# Altium PCB Ttem_Lumineux.PcbDoc
Units mil, origin at the board's own origin, x right, y up, seen from the top; angles counter-clockwise.
Board outline 4310 x 3435 mil, 2 copper layers (Top Layer, Bottom Layer); 60 components, 47 nets, 231 pads, 671 vias.
Unrouted connection lines stored in the file: 53.
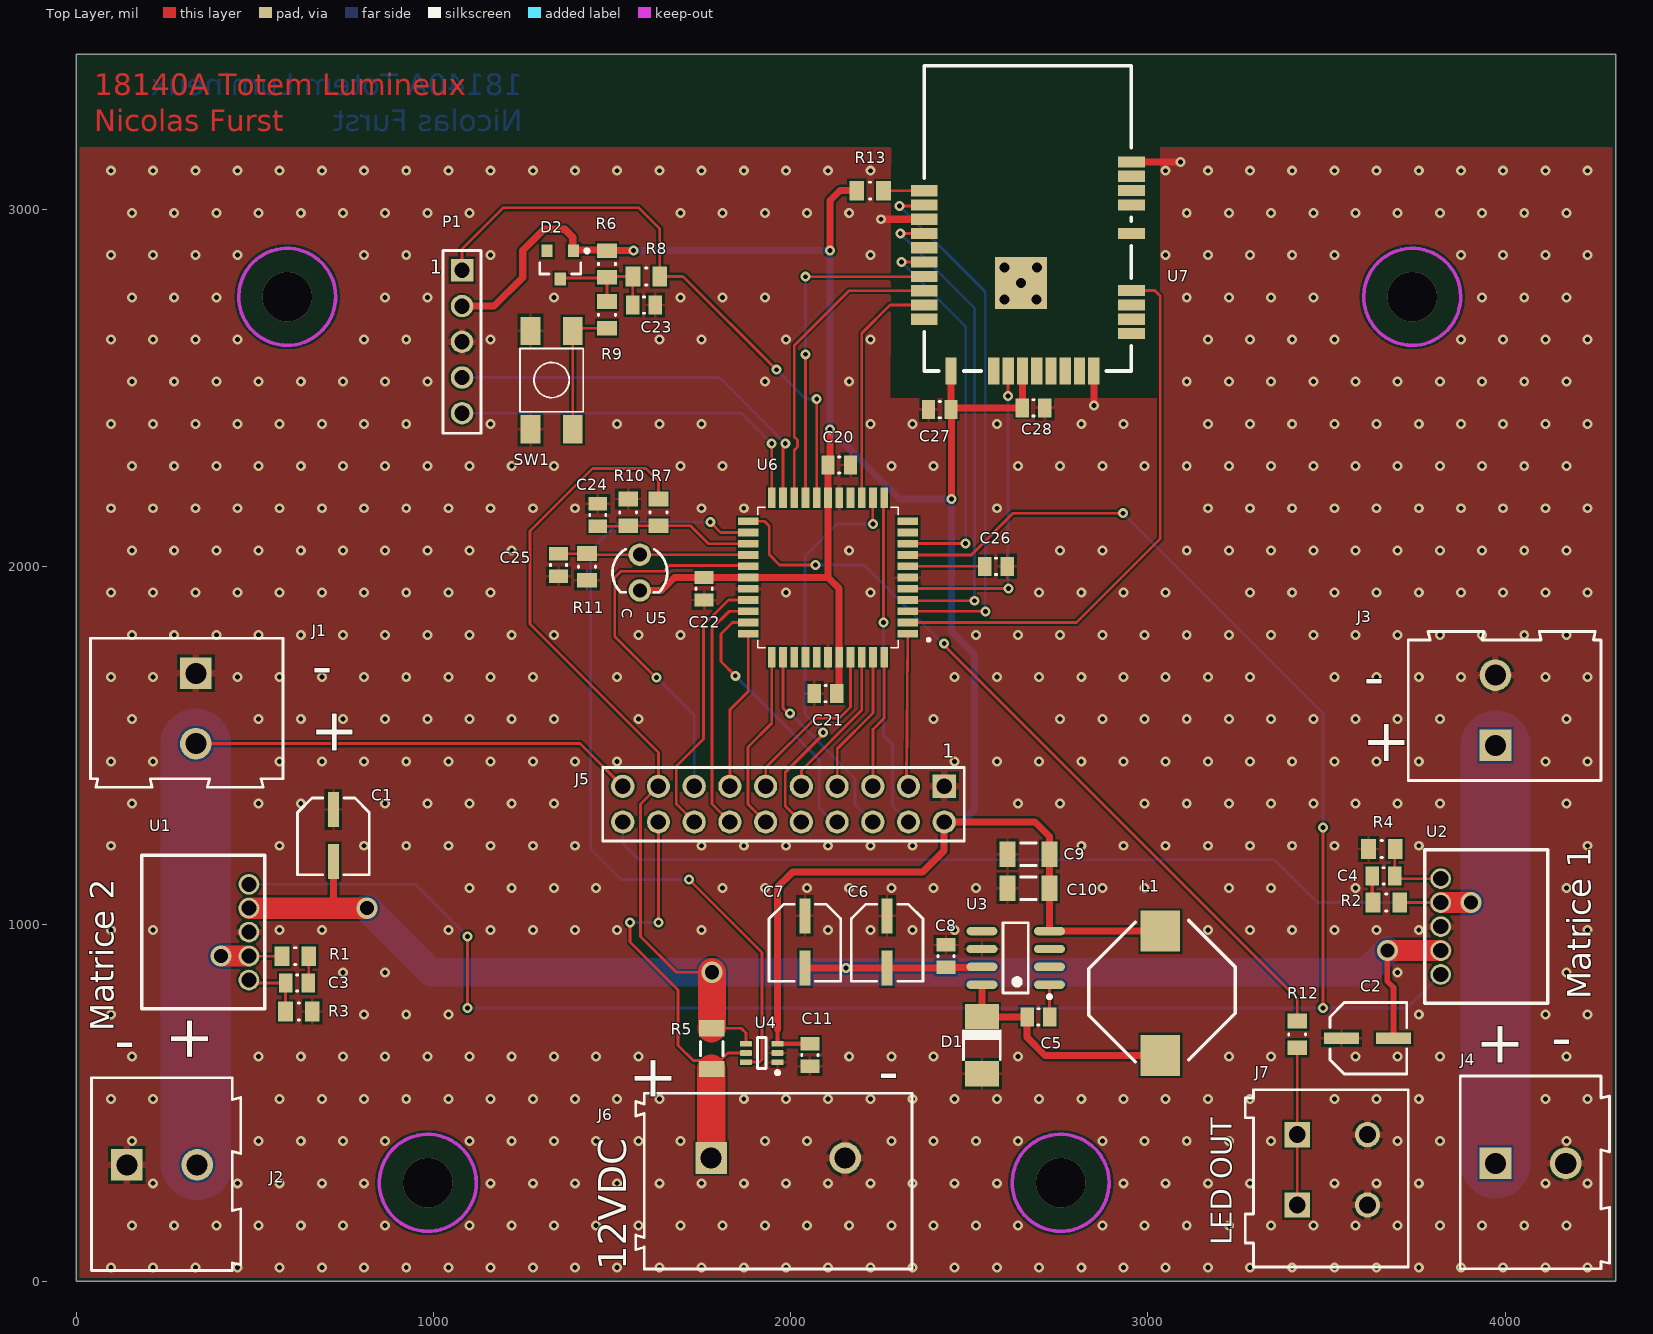
[diagram p0: Top Layer view]
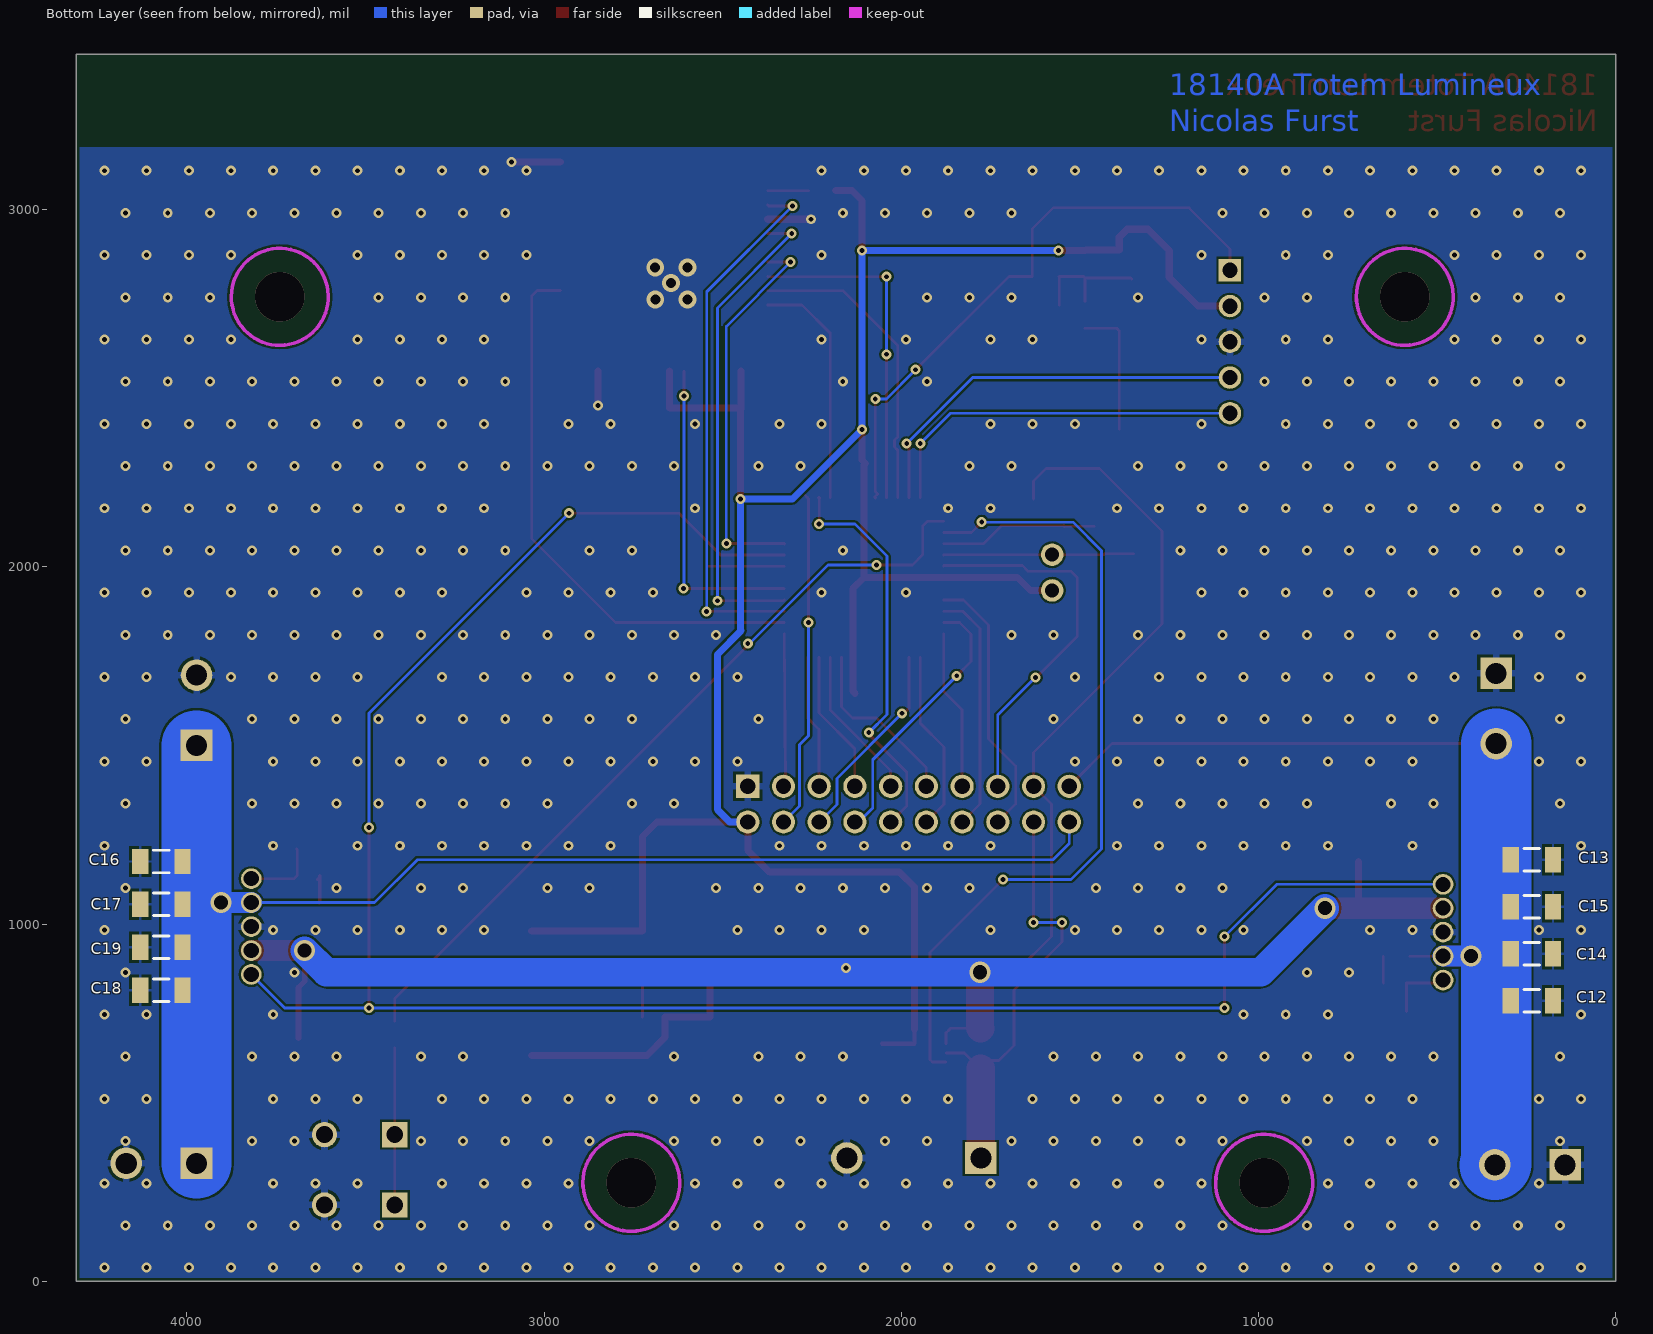
[diagram p1: Bottom Layer view, seen from below]

## Layer stack, top to bottom
Top Solder: solder mask 0.4, Solder Resist, Dk 3.5
Top Layer: signal copper 1.4
Dielectric 1: dielectric 12.6, FR-4, Dk 4.8
Bottom Layer: signal copper 1.4
Bottom Solder: solder mask 0.4, Solder Resist, Dk 3.5

## Board outline
0,0 0,3435 4310,3435 4310,0

## Design rules (kind name [scope] priority, off if disabled: settings)
BoardOutlineClearance [All] p1: gap=9.84 ignorepadtopadclearanceinfootprint=FALSE except(0: Arc-SplitContinuation Track-SplitContinuation SMDPad-SplitContinuation THPad-SplitContinuation Via-SplitContinuation Fill-SplitContinuation Poly-SplitContinuation Region-SplitContinuation Text-SplitContinuation)
Clearance Clearance-xPP-xTP-xTT [All] p1: gap=5.91 ignorepadtopadclearanceinfootprint=FALSE except(0: Arc-Hole Track-Hole SMDPad-Hole THPad-Hole Via-Hole Fill-Hole Poly-Hole Region-Hole Text-Hole)
ComponentClearance [All] p1: gap=9.84 collisioncheckmode=3 verticalgap=9.84 showdistances=FALSE
DiffPairsRouting [All] p1: maxlimit=9.84 minlimit=9.84 mostfreqgap=9.84 toplayer_minwidth=15 toplayer_maxwidth=15 toplayer_prefwidth=15 bottomlayer_minwidth=15 bottomlayer_maxwidth=15 bottomlayer_prefwidth=15 maxuncoupledlength=492.13
Height [All] p1: minheight=0 maxheight=984.25 prefheight=492.13
HoleSize HoleSize-PTH [All] p1: absolutevalues=TRUE maxlimit=393.7 minlimit=9.84 maxpercent=80.000 minpercent=20.000
HoleToHoleClearance [All] p1: gap=13.78 allowstackedmicrovias=TRUE
MinimumAnnularRing "Minimum IAR  >0.45mm" [((ObjectKind = 'Pad') OR (ObjectKind = 'Via')) And (Layer = 'MultiLayer') And (HoleDiameter > AsMM(0.45))] p1: minimumring=6.89 // minimum inner annular ring for pads > 0.45mm finished hole size
MinimumAnnularRing "Minimum IAR <=0.45mm" [((ObjectKind = 'Pad') OR (ObjectKind = 'Via')) And (Layer = 'MultiLayer') And (HoleDiameter <= AsMM(0.45))] p2: minimumring=6.89 // minimum inner annular ring for pads <= 0.45mm finished hole size
MinimumSolderMaskSliver [All] p1: minsoldermaskwidth=3.15
PlaneClearance PlaneClearance-IPI [All] p1: clearance=9.84
PlaneConnect [All] p1: planeconnectstyle=Relief reliefexpansion=6.89 reliefentries=4 reliefconductorwidth=7.87 reliefairgap=7.87
PolygonConnect PolygonConnect-xTW [All] p1: thpad.connectstyle=Relief thpad.reliefconductorwidth=19.68 thpad.reliefentries=4 thpad.polygonreliefangle="90 Angle" thpad.airgapwidth=7.87 smdpad.connectstyle=Relief smdpad.reliefconductorwidth=7.87 smdpad.reliefentries=4 smdpad.polygonreliefangle="90 Angle" smdpad.airgapwidth=7.87 via.connectstyle=Direct via.reliefconductorwidth=7.87 via.reliefentries=4 via.polygonreliefangle="90 Angle" via.airgapwidth=7.87
RoutingCorners [All] p1: cornerstyle=45-Degree minsetback=98.43 maxsetback=98.43
RoutingVias RoutingViasES [(ObjectKind = 'Via')] p1: holewidth=11.81 width=25.59 viastyle="Through Hole" minholewidth=9.84 minwidth=24.02 maxholewidth=17.72 maxwidth=31.5 // finishet hole size <= 0.45mm
SilkToSilkClearance [All] p1: silktosilkclearance=7.87
SilkToSolderMaskClearance SilkscreenOverComponentPads [IsPad] p1: minsilkscreentomaskgap=7.87 clearancetoexposedcopper=TRUE
SolderMaskExpansion [All] p1: expansion=0 istentingtop=FALSE
UnRoutedNet [All] p1: checkbadconnections=TRUE
Width Width-xTW [All] p1: maxlimit=393.7 minlimit=5.91 preferedwidth=7.87
18 further rules are at their usual default settings.

## Classes and differential pairs
net class Power: 5V_1 5V_2 12Vbatt Vbatt
component class Pic: C20 C21 C22 C23 C24 C25 C26 C27 C28 D2 J7 P1 R6 R7 R8 R9 R10 R11 R12 R13 SW1 U5 U6 U7
component class Alim: C1 C2 C3 C4 C5 C6 C7 C8 C9 C10 C11 C12 C13 C14 C15 C16 C17 C18 C19 D1 J1 J2 J3 J4 J5 J6 L1 R1 R2 R3 R4 R5 U1 U2 U3 U4

## Components (designator, comment, footprint, x,y, rotation, side; value= is the part's Value field where it differs from the comment)
C1 "47uF" Capacitor 720,1247.83 r90 top
C2 "47uF" Capacitor 3615,680 r180 top
C3 "39nF" CAPC0805(2012)155_L 618.42,835 r0 top value=4.7uF
C4 "39nF" CAPC0805(2012)155_L 3660,1135 r0 top value=4.7uF
C5 "10nF" CAPC0805(2012)155_L 2693.66,740 r180 top value=4.7uF
C6 "47uF" Capacitor 2270,950 r90 top
C7 "47uF" Capacitor 2040,950 r90 top
C8 "100n" CAPC0805(2012)155_L 2435,910 r90 top value=4.7uF
C9 "47uF" CAPC1206(3216)190_N 2665.94,1195 r0 top
C10 "47uF" CAPC1206(3216)190_N 2665.94,1100 r0 top
C11 "100n" CAPC0805(2012)155_L 2053.94,633.03 r270 top value=4.7uF
C12 "47uF" CAPC1206(3216)190_N 235,785 r0 bottom
C13 "47uF" CAPC1206(3216)190_N 235,1180 r0 bottom
C14 "47uF" CAPC1206(3216)190_N 235,916.67 r0 bottom
C15 "47uF" CAPC1206(3216)190_N 235,1048.33 r0 bottom
C16 "47uF" CAPC1206(3216)190_N 4071.89,1175 r180 bottom
C17 "47uF" CAPC1206(3216)190_N 4071.89,1055 r180 bottom
C18 "47uF" CAPC1206(3216)190_N 4071.89,815 r180 bottom
C19 "47uF" CAPC1206(3216)190_N 4071.89,935 r180 bottom
C20 "100n" CAPC0805(2012)155_L 2136.02,2285 r180 top value=4.7uF
C21 "100n" CAPC0805(2012)155_L 2097.76,1645 r0 top value=4.7uF
C22 "100n" CAPC0805(2012)155_L 1757.76,1938.5 r90 top value=4.7uF
C23 "" CAPC0805(2012)155_L 1589.45,2732.76 r180 top value=4.7uF
C24 "100n" CAPC0805(2012)155_L 1460,2145 r270 top value=4.7uF
C25 "100n" CAPC0805(2012)155_L 1350,2005 r90 top value=4.7uF
C26 "10uF" CAPC0805(2012)155_L 2575,2001.5 r180 top value=4.7uF
C27 "100n" CAPC0805(2012)155_L 2417.44,2440 r0 top value=4.7uF
C28 "100n" CAPC0805(2012)155_L 2680,2445 r180 top value=4.7uF
D1 "SK32" DO-214AC 2535.51,660.28 r270 top
D2 "BAS40-06LT1G" ONSC-SOT-23-3-318-08_V 1355,2845 r270 top
J1 "691211720002" 691211720002 309.41,1603.43 r270 top
J2 "691211720002" 691211720002 240,300 r0 top locked
J3 "691211720002" 691211720002 3998.74,1598.43 r90 top locked
J4 "691211720002" 691211720002 4071.57,304.41 r0 top locked
J5 "61302021121" 61302021121 1980,1335.59 r180 top
J6 "691250910002" 691250910002 1965,280 r0 top locked
J7 "691411710002B" 691411710002B 3500.83,288.23 r0 top locked
L1 "DO3308P-684" DO3308P 3035,689.84 r90 top
P1 "61300511121" 61300511121 1080,2630 r270 top
R1 "47R" RESC0805(2012)_N 613.42,910 r180 top value="1000000.00 Ohm"
R2 "47R" RESC0805(2012)_N 3667.6,1060 r0 top value="1000000.00 Ohm"
R3 "270R" RESC0805(2012)_N 623.42,755 r180 top value="1000000.00 Ohm"
R4 "270R" RESC0805(2012)_N 3655,1210 r0 top value="1000000.00 Ohm"
R5 "3mOhm" RESC1206(3216)_N 1778.94,651.02 r270 top value="1000000.00 Ohm"
R6 "" RESC0805(2012)_N 1485.94,2847.76 r90 top value="1000000.00 Ohm"
R7 "82k" RESC0805(2012)_N 1630,2152.4 r90 top value="1000000.00 Ohm"
R8 "" RESC0805(2012)_N 1595.94,2812.76 r180 top value="1000000.00 Ohm"
R9 "" RESC0805(2012)_N 1485.95,2705.16 r90 top value="1000000.00 Ohm"
R10 "18k" RESC0805(2012)_N 1545,2152.4 r270 top value="1000000.00 Ohm"
R11 "300R" RESC0805(2012)_N 1430,2000 r90 top value="1000000.00 Ohm"
R12 "0R" RESC0805(2012)_N 3418.15,690.83 r270 top value="1000000.00 Ohm"
R13 "1M" RESC0805(2012)_N 2222.4,3053.03 r180 top value="1000000.00 Ohm"
SW1 "430181038816" 430181038816 1330.94,2522.76 r90 top
U1 "DC-DC _12to5V" DC-DC 483.42,1111.18 r270 top
U2 "DC-DC _12to5V" DC-DC 3820,858.82 r90 top
U3 "LM2674M-3.3" M08A_N 2630,905 r180 top
U4 "INA214AIDCKT" DCK0006A_N 1918.94,638.94 r180 top
U5 "TEPT4400" "Type 3mm" 1577.76,1983.94 r270 top
U6 "PIC32MX130F256D" QFP80P1200X1200X120-44N 2104.53,1970 r180 top
U7 "ATWILC1000" ATWILC1000 2374.13,2548.15 r0 top locked

## Footprints (in the part's own frame and the unit in brackets; to place one, negate y for a bottom-side part, rotate by r counter-clockwise, add the part's x,y. Pads: shape width x height; smd on the part's side, far side on the other; paste and mask are expansions set on the pad)
61300511121 [mm] "Pin Header, pitch 2.54 mm, THT, Vertical, single row, 5p"
  rect 1.6x1.6 hole 1.1: 1(-5.08,0)
  round 1.6 hole 1.1: 2(-2.54,0) 3(0,0) 4(2.54,0) 5(5.08,0)
  silkscreen extent -6.5,-1.35 6.5,1.35, body extent -6.35,-1.27 6.35,1.27, height 8.57
61302021121 [mm] "Pin Header, pitch 2.54 mm, THT, Vertical, dual row, 20p"
  rect 1.65x1.65 hole 1.1: 1(-11.43,-1.27)
  round 1.65 hole 1.1: 2(-11.43,1.27) 3(-8.89,-1.27) 4(-8.89,1.27) 5(-6.35,-1.27) 6(-6.35,1.27) 7(-3.81,-1.27) 8(-3.81,1.27) 9(-1.27,-1.27) 10(-1.27,1.27) 11(1.27,-1.27) 12(1.27,1.27) 13(3.81,-1.27) 14(3.81,1.27) 15(6.35,-1.27) 16(6.35,1.27) 17(8.89,-1.27) 18(8.89,1.27) 19(11.43,-1.27) 20(11.43,1.27)
  silkscreen extent -12.85,-2.62 12.85,2.62, body extent -12.7,-2.54 12.7,2.54, height 8.59
430181038816 [mm] "4.5*4.5mm vertical type, SMD, height 3.8mm, black actuator, 160gf, T&R"
  rect 2x1.4 smd: 1(-3.5,1.5) 2(3.5,1.5) 3(-3.5,-1.5) 4(3.5,-1.5)
  silkscreen extent -2.25,-2.25 2.25,2.25, body extent -3.75,-2.25 3.75,2.25, height 3.78
691211720002 [mm] "5,00mm - modular - green -45¡ã entry with rising cage clamp - 02p"
  rect 2.25x2.25 hole 1.5: 1(-2.5,0.65)
  round 2.25 hole 1.5: 2(2.5,0.65)
  silkscreen extent -5,-6.85 5.6,6.85, body extent -5,-6.85 5.6,6.85, height 15.72
691250910002 [mm] "Serie 2509 - 9.52 mm _ 2 pins"
  rect 2.25x2.25 hole 1.5: 1(-4.76,1.65)
  round 2.25 hole 1.5: 2(4.76,1.65)
  silkscreen extent -10.12,-6.25 9.52,6.25, body extent -10.12,-6.25 9.52,6.25, height 21.6
691411710002B [mm] "5.00 mm Screwless Horizontal Entry - 2.0 mm2 Wires, 2p"
  rect 1.8x1.8 hole 1.2: 1(-2.1,-1.9) 1(-2.1,3.1)
  round 1.8 hole 1.2: 2(2.9,-1.9) 2(2.9,3.1)
  silkscreen extent -5.8,-6.3 5.8,6.3, body extent -5.8,-6.3 5.8,6.3, height 15.65
ATWILC1000 [mm]
  rect 1.9x0.8 smd: 1(14.73,2.67) 2(14.73,3.686) 3(14.73,4.702) 4(14.73,5.718) 5(14.73,9.782) 6(14.73,11.814) 7(14.73,12.83) 8(14.73,13.846) 9(14.73,14.862) 10(0,12.824) 11(0,11.808) 12(0,10.792) 13(0,9.776) 14(0,8.76) 15(0,7.744) 16(0,6.728) 17(0,5.712) 18(0,4.696) 19(0,3.68)
  rect 0.8x1.9 smd: 20(1.9,0) 21(4.948,0) 22(5.964,0) 23(6.98,0) 24(7.996,0) 25(9.012,0) 26(10.028,0) 27(11.044,0) 28(12.06,0)
  rect 3.7x3.7 smd: 29(6.88,6.27)
  silkscreen extent 0,0 14.73,21.72
Capacitor [mm]
  rect 2.5x0.8 smd: 1(-1.85,0) 2(1.85,0)
  silkscreen extent -2.79,-2.55 2.67,2.55
CAPC0805(2012)155_L [mm] "Chip Capacitor, Body 2.0x1.2mm, Height 1.55mm, IPC High Density"
  rect 0.95x1.35 smd: 1(-0.8,0) 2(0.8,0)
  silkscreen extent -0.05,-0.58 0.05,0.58, body extent -1.1,-0.72 1.1,0.72, height 1.55
CAPC1206(3216)190_N [mm] "Chip Capacitor, Body 3.2x1.6mm, Height 1.9mm, IPC Medium Density"
  rect 1.15x1.8 smd: 1(-1.5,0) 2(1.5,0)
  silkscreen extent -0.55,-0.8 0.55,0.8, body extent -1.7,-0.9 1.7,0.9, height 1.9
DC-DC [mm]
  round 1.47 hole 1.07: 1(0,0) 2(1.7,0) 3(3.4,0) 4(5.11,0) 5(6.81,0)
  silkscreen extent -2.06,-7.62 8.86,1.14
DCK0006A_N [mm] "SOT23, 6-Leads, Body 2.15x1.4mm, Pitch 0.65mm, IPC Medium Density"
  rrect25% 0.85x0.4 smd: 1(-1.125,0.65) 2(-1.125,0) 3(-1.125,-0.65) 4(1.125,-0.65) 5(1.125,0) 6(1.125,0.65)
  silkscreen extent -1.25,-1.1 0.3,1.52, body extent -1.14,-1 1.14,1, height 0.94
DO3308P [mm]
  rect 2.92x2.79 smd: 1(-1.46,0) 2(7.37,0)
  silkscreen extent -1.91,-5.33 8.13,5.08
DO-214AC [mm]
  rect 1.8x2.4 smd: 1(-2.025,0) 2(2.025,0)
  silkscreen extent -1.06,-1.3 1.02,1.3
M08A_N [mm] "SOIC, 8-Leads, Body 4.9x3.9mm, Pitch 1.27mm, IPC Medium Density"
  oval 2.2x0.6 smd: 1(-2.4,1.905) 2(-2.4,0.635) 3(-2.4,-0.635) 4(-2.4,-1.905) 5(2.4,-1.905) 6(2.4,-0.635) 7(2.4,0.635) 8(2.4,1.905)
  silkscreen extent -2.53,-2.5 0.9,2.88, body extent -2,-2.5 2,2.5, height 1.75
ONSC-SOT-23-3-318-08_V [mm] "SOT23, 3-Leads, Body 2.92x1.3mm, Pitch 0.95mm"
  rect 0.9x0.8 smd: 1(-1,0.95) 2(-1,-0.95) 3(1,0)
  silkscreen extent -1.12,-1.46 0.65,2.03, body extent -0.65,-1.46 0.65,1.46, height 1.11
QFP80P1200X1200X120-44N [mm]
  rect 1.47x0.55 smd: 1(-5.67,4) 2(-5.67,3.2) 3(-5.67,2.4) 4(-5.67,1.6) 5(-5.67,0.8) 6(-5.67,0) 7(-5.67,-0.8) 8(-5.67,-1.6) 9(-5.67,-2.4) 10(-5.67,-3.2) 11(-5.67,-4) 23(5.67,-4) 24(5.67,-3.2) 25(5.67,-2.4) 26(5.67,-1.6) 27(5.67,-0.8) 28(5.67,0) 29(5.67,0.8) 30(5.67,1.6) 31(5.67,2.4) 32(5.67,3.2) 33(5.67,4)
  rect 0.55x1.47 smd: 12(-4,-5.67) 13(-3.2,-5.67) 14(-2.4,-5.67) 15(-1.6,-5.67) 16(-0.8,-5.67) 17(0,-5.67) 18(0.8,-5.67) 19(1.6,-5.67) 20(2.4,-5.67) 21(3.2,-5.67) 22(4,-5.67) 34(4,5.67) 35(3.2,5.67) 36(2.4,5.67) 37(1.6,5.67) 38(0.8,5.67) 39(0,5.67) 40(-0.8,5.67) 41(-1.6,5.67) 42(-2.4,5.67) 43(-3.2,5.67) 44(-4,5.67)
  silkscreen extent -7.26,-5 5,5
RESC0805(2012)_N [mm] "Chip Resistor, Body 2.0x1.3mm, IPC Medium Density"
  rect 1.05x1.4 smd: 1(-0.95,0) 2(0.95,0)
  silkscreen extent -0.05,-0.6 0.05,0.6, body extent -1.1,-0.67 1.1,0.68, height 0.7
RESC1206(3216)_N [mm] "Chip Resistor, Body 3.2x1.6mm, IPC Medium Density"
  rect 1.15x1.8 smd: 1(-1.45,0) 2(1.45,0)
  silkscreen extent -0.5,-0.8 0.5,0.8, body extent -1.67,-0.87 1.67,0.87, height 0.75
"Type 3mm" [mm] "THT, LED-3mm, 2pin- Body 4.15mm(max)"
  round 1.6 hole 1: 1(1.27,0) 2(-1.27,0)
  silkscreen extent -1.66,-1.95 1.4,1.95, body extent -1.93,-1.94 1.87,1.94, height 10.5

## Part data
C1 C2 C6 C7: library part CMP-2000-06221-1, "Conductive Polymer Hybrid Aluminum Electrolytic Capacitor, 100 uF, +/- 20%, 50 V, -55 to 105 degC, 2-Pin SMD (G), RoHS, Tape and Reel", Capacitance=100uF, Case Diameter=10mm, Case Height=10.5mm, Case Length=10.2mm, Manufacturer=Panasonic, Maximum Operating Temperature=+105C, Minimum Operating Temperature=-55C, Package Description="2-Pin Surface Mount Device, Body 10.3 x 10.3 mm", Package Reference=ZA-G, Ripple Current=2A, Tolerance=20%, Voltage Rating DC=50V, Brand=Panasonic, Datasheet URL=https://industrial.panasonic.com/cdbs/www-data/pdf/RDD0000/DMD0000COL56.pdf, Datasheet Version=06/2016, ESR=28mOhms, Factory Pack Quantity=500, Height=10.5mm, Load Life=10000Hour, Manufacturer URL=http://www.panasonic.com/, Mounting Technology=SurfaceMount, Packaging=Reel, Product=AluminumElectrolyticCapacitors, Product Category=AluminumOrganicPolymerCapacitors, RoHS=Details, Series=ZA, Termination Style=SMD/SMT
C3 C4 C5 C8 C11 C20 C21 C22 C23 C24 C25 C26 C27 C28: library part Capa, Case-EIA=0805, Case-Metric=2012, Rated Voltage="10 V", Tolerance=Â±10%, Max Thickness="1.55 mm", Technology=SMT
C9 C10 C12 C13 C14 C15 C16 C17 C18 C19: library part CMP-1037-05002-1, "CAP 47uF 10V ±20% 1206 (3216 Metric) Thickness 1.9mm SMD", Case-EIA=1206, Case-Metric=3216, Rated Voltage="10 V", Tolerance=Â±20%, Max Thickness="1.9 mm", Technology=SMT
D1: "Shotky diod", Emitting color="Super Red", Manufacturer="Wuerth Elektronik", PartNumber=151031SS04000, ComponentLink1Description="Manufacturer URL", ComponentLink1URL=http://www.we-online.com, ComponentLink2Description=Datasheet, ComponentLink2URL=http://katalog.we-online.de/pbs/datasheet/7448042001.pdfhttp://katalog.we-online.de/pbs/datasheet/7448042001.pdfhttp://katalog.we-online.de/pbs/datasheet/7448042001.pdfhttp://katalog.we-online.de/pbs/datasheet/151031SS04000.pdf, PackageReference="Type 3mm"
D2: library part CMP-1055-00547-1, "Common Anode Schottky Barrier Diodes, 3-Pin SOT-23, Pb-Free, Tape and Reel", Manufacturer="On Semiconductor", ComponentLink1Description="Manufacturer URL", ComponentLink1URL=http://www.onsemi.com/, ComponentLink2Description=Datasheet, ComponentLink2URL=http://www.onsemi.cn/pub_link/Collateral/BAS40-06LT1-D.PDF, ComponentLink3Description="Package Specification", ComponentLink3URL=http://www.onsemi.cn/pub_link/Collateral/318-08.PDF, Configuration="Common Anode", DatasheetVersion="Rev. 8", Mounting Technology="Surface Mount", PackageDescription="3-Pin Small Outline Transistor, Body 2.92 x 1.3 mm, Pitch 0.95 mm", PackageReference=SOT-23-3-318-08, PackageVersion="Rev. AP, 11/2009", Packing="Tape and Reel", PartNumber=BAS40-06LT1G, RoHS=TRUE
J1 J2 J3 J4: library part CMP-1502-02524-1, "Serie 211 - 5.00 mm 45deg Entry Modular with Rising Cage Clamp - 15.50 mm Height WR-TBL, 2 pin", Manufacturer="Wurth Elektronik", Operating Temperature=-40to105degC, Datasheet URL=http://katalog.we-online.de/em/datasheet/6912117200xx.pdf, Manufacturer URL=http://www.we-online.de, Mounting Technology=THT, Package Reference=691211720002, Packaging=Box, Part Number=691211720002, Pin Number=2, Pitch=5.00mm, Publisher=WurthElektronik
J5: library part CMP-1502-01104-1, "THT Vertical Pin Header WR-PHD, Pitch 2.54 mm, Dual Row, 20 pins", Contact Resistance=20mOhm, Manufacturer="Wurth Elektronik", Operating Temperature=-40to105degC, Rated Current=3A, Withstanding Voltage=500VAC, Working Voltage=250VAC, Datasheet URL=https://katalog.we-online.de/em/datasheet/6130xx21121.pdf, Gender=Male, Manufacturer URL=http://www.we-online.de, Mounting Technology=THT, Orientation=Vertical, Package Reference=61302021121, Packaging=Bag, Part Number=61302021121, Pin Number=20, Pitch=2.54mm, Publisher=WurthElektronik, Row Number=Dual
J6: library part CMP-1502-02750-1, "Serie 2509 - 9.52 mm Horizontal Entry Modular with Rising Cage Clamp WR-TBL, 2 pin", Manufacturer="Wurth Elektronik", Operating Temperature=-30to120degC, Datasheet URL=http://katalog.we-online.de/em/datasheet/6912509100XX.pdf, Manufacturer URL=http://www.we-online.de, Mounting Technology=THT, Package Reference=691250910002, Packaging=Box, Part Number=691250910002, Pin Number=2, Pitch=9.52mm, Publisher=WurthElektronik
J7: library part CMP-1502-03026-1, "Serie 411 B - 5.00mm Screwless Horizontal Entry-2.0mm2 Wires WR-TBL, 2 pin", Manufacturer="Wurth Elektronik", Operating Temperature=-40to105degC, Datasheet URL=http://katalog.we-online.de/em/datasheet/6914117100xxB.pdf, Manufacturer URL=http://www.we-online.de, Mounting Technology=THT, Package Reference=691411710002B, Packaging=Box, Part Number=691411710002B, Pin Number=2, Pitch=5.00mm, Publisher=WurthElektronik
P1: library part CMP-1502-01068-1, "THT Vertical Pin Header WR-PHD, Pitch 2.54 mm, Single Row, 5 pins", Contact Resistance=20mOhm, Manufacturer="Wurth Elektronik", Operating Temperature=-40to105degC, Rated Current=3A, Withstanding Voltage=500VAC, Working Voltage=250VAC, Datasheet URL=https://katalog.we-online.de/em/datasheet/6130xx11121.pdf, Gender=Male, Manufacturer URL=http://www.we-online.de, Mounting Technology=THT, Orientation=Vertical, Package Reference=61300511121, Packaging=Bag, Part Number=61300511121, Pin Number=5, Pitch=2.54mm, Publisher=WurthElektronik, Row Number=Single
R1 R2 R3 R4 R5 R6 R7 R8 R9 R10 R11 R12 R13: library part Resistor, Case-EIA=0805, Case-Metric=2012, Power="0.125 W", Tolerance="1 %", Technology=SMT
SW1: library part CMP-1454-00001-1, "WS-TASV SMD Tact Switch 4.5X4.5 mm", Manufacturer="Wuerth Elektronik", ComponentLink1Description="Manufacturer URL", ComponentLink1URL=http://www.we-online.com, ComponentLink2Description=Datasheet, ComponentLink2URL=http://katalog.we-online.de/em/datasheet/430181038816.pdf, NoPins=04, PackageReference=430181038816, PartNumber=430181038816
U3: library part CMP-0069-00679-2, "SIMPLE SWITCHER® Power Converter High Efficiency 500mA Step-Down Voltage Regulator, 8-pin Narrow SOIC", Manufacturer="National Semiconductor", PackageTopMarking=NSZXTT*2674*M3.3, PowerWise=N, Code_IPC=SOIC127P600-8, Code_JEDEC=MS-012-AA, ComponentLink1Description="LM2674 Datasheet", ComponentLink1URL=http://www.national.com/ds/LM/LM2674.pdf, ComponentLink2Description="LM2674 Web Page", ComponentLink2URL=http://www.national.com/pf/LM/LM2674.html, ComponentLink3Description="M08A Package Page", ComponentLink3URL=http://www.national.com/packaging/folders/m08a.html, CompType=Switcher, DatasheetVersion=Mar-2005, PackageDescription="SOIC Narrow, 4.9 x 3.9 x 1.45mm, 8 Lead, 1.27mm Pitch", PackageReference=M08A, PackageVersion="revM, May-2009", PinCount=8, RevisionNote="Component URLs added", RoHS=N
U4: library part CMP-2000-06456-1, "Voltage Output, High / Low-Side Measurement, Bi-Directional Zero-Drift Series, Current Shunt Monitor, 2.7 to 26 V, -40 to 125 degC, 6-Pin SOT-23 (DCK6), Green (RoHS & no Sb/Br), Tape and Reel", Manufacturer=TexasInstruments, Maximum Operating Temperature=+125C, Minimum Operating Temperature=-40C, Operating Supply Current=115uA, Package / Case=SOT-23-6, Package Description="6-Pin Plastic Small Outline, Body 2 x 1.25 mm, Pitch 0.65 mm", Package Reference=DCK6, Package Version="4093553-4/G, 01/2007", Supply Voltage - Max=26V, Supply Voltage - Min=2.7V, Vcm - Common Mode Voltage=-0.3Vto+26V, Vos - Input Offset Voltage=60uV, Accuracy=1%, Amplifier Type=CurrentSense, Brand=TexasInstruments, CMRR - Common Mode Rejection Ratio=105dB, Datasheet URL=http://www.ti.com/lit/gpn/INA214?keyMatch=INA214AIDCKT&tisearch=Search-EN-Everything, Datasheet Version="Rev. G, 07/2014", Development Kit=INA210-214EVM, Gain Error=0.02%, Gain V/V=100V/V, GBP - Gain Bandwidth Product=30kHz, Manufacturer URL=http://www.ti.com/, Mounting Style=SMD/SMT, Mounting Technology=SurfaceMount, Number of Channels=1Channel, Packaging=Reel, Product=CurrentSenseAmplifiers, Product Category=CurrentSenseAmplifiers, RoHS=True, Series=INA214, Topology=CurrentShuntFeedback, Unit Weight=0.000088oz
U6: Manufacturer=Microchip, PartNumber=PIC32MX130F064D-I/TL, ComponentLink1Description="Manufacturer URL", ComponentLink1URL=http://www.microchip.com, ComponentLink2Description=Datasheet, ComponentLink2URL=http://ww1.microchip.com/downloads/en/DeviceDoc/61168E.pdf, ComponentLink3Description="Package Specification", ComponentLink3URL=http://www.microchip.com/stellent/groups/techpub_sg/documents/packagingspec/en012702.pdf, ComponentLink4Description="Product URL", ComponentLink4URL=http://www.microchip.com/PIC32MX130F064D, DatasheetVersion="Rev. E", Mounting Technology="Surface Mount", PackageDescription="44-Lead Terminal Very Thin Leadless Array Package, 6 x 6 mm Body, 0.5 mm Pitch", PackageReference=VTLA-TL44, PackageVersion=C04-157C

## Via types
v1: diameter 27.95, hole 13.78, Top Layer to Bottom Layer, tented both sides, 657 vias
v2: diameter 59.06, hole 39.37, Top Layer to Bottom Layer, 5 vias
v3: diameter 50, hole 28, Top Layer to Bottom Layer, 5 vias
v4: diameter 137.8, hole 137.8, Top Layer to Bottom Layer, 4 vias

## Nets (pads, with @x,y where several pads share a name; then routed paths per layer and width w, separated by ;. In a path a pad name is that pad's centre, name@x,y a point inside that pad or via, vN(x,y) a via of type N, cw(c..) or ccw(c..) an arc to the next point about the centre after c; other vN are vias at no path point)
3V3: C9.2 C10.2 C11.1 C20.2 C21.2 C22.2 C27.2 C28.2 D2.1 J5.2 L1.2 P1.2 R6.2 R13.2 U3.4 U4.3 U5.1 U6.17 U6.28 U6.40 U7.20 U7.23 | length 7326.7
  Top Layer w11.81: 1963.23,705 U4.3 C11.1
  Top Layer w19.68: P1.2 1170,2730 1250,2810 1250,2885.63 1309.37,2945 1367.64,2945 1390,2922.64 1390,2887.13 1483.98,2887.13 R6.2 1486.1,2885 v1(1560,2885) ; U5.1 1638.46,1933.94 1674.53,1970 C22.2 U6.28 2105,1970 ; 1963.23,705 1963.23,1103.23 2005,1145 2368.66,1145 2430,1206.34 J5.2 2684.41,1285.59 2725,1245 C9.2 C10.2 2725,980.51 U3.4 L1.2 ; v1(2110,2384.96) 2110,2299.53 2100,2289.53 C20.2 U6.17 2104.53,1970.47 2105,1970 ; v1(2110,2885) 2110,3025 2138.03,3053.03 R13.2 ; C21.2 2136.02,1651.77 U6.40 2136.02,1938.98 2105,1970 ; U7.20 C27.2 ; v1(2450,2190) 2450,2438.94 C27.2 ; U7.23 2648.94,2445.43 C28.2 2453.94,2445 C27.2
  Bottom Layer w19.68: v1(1560,2885) v1(2110,2885) v1(2110,2384.96) 2304.96,2190 v1(2450,2190) 2450,1822.13 2448.94,1821.06 2515,1755 2515,1320 2480.59,1285.59 J5.2
5V_1: C12.2 C13.2 C14.2 C15.2 J1.2 J2.2 J5.19 R1.2 U1.4 | length 2674.7
  Top Layer w7.87: J1.2 1410.59,1505 J5.19 ; U1.4 R1.2
  Top Layer w59.06: v2(405,910) U1.4
  Bottom Layer w59.06: v2(405,910) U1.4
  Bottom Layer w196.85: J1.2 335,329.02 J2.2
5V_2: C16.2 C17.2 C18.2 C19.2 J3.1 J4.1 J5.20 R2.2 U2.4 | length 3942.1
  Top Layer w7.87: R2.2 U2.4
  Top Layer w59.06: U2.4 v2(3905,1060)
  Bottom Layer w7.87: J5.20 1530,1225 1575,1180 3355,1180 3475,1060 U2.4 ; v2(3905,1060) 3973.15,1060
  Bottom Layer w59.06: U2.4 v2(3905,1060)
  Bottom Layer w196.85: J4.1 3973.15,1060 J3.1
12Vbatt: C1.1 C2.1 C6.1 C7.1 C8.1 J5.17 R5.1 R7.2 U1.2 U2.2 U3.7 U4.4 | length 6648.8
  Top Layer w7.87: R7.2 1630,2240 1595,2275 1445,2275 1270,2100 1270,1840 1630,1480 J5.17 1580,1335.59 1580,965 1680,865 v2(1780,865) ; R5.1 1861.89,708.11 1874.65,695.35 U4.4
  Top Layer w15.75: v2(3670.75,925.75) 3670.75,839.25 3687.83,822.17 C2.1
  Top Layer w19.68: 720,1044.25 C1.1 ; C7.1 v1(2155,877.17) C6.1 2433.66,877.17 C8.1 2534.02,878.5 U3.7
  Top Layer w59.06: U1.2 720,1044.25 v2(814.25,1044.25) ; v2(3670.75,925.75) U2.2
  Top Layer w78.74: R5.1 1780,709.17 v2(1780,865)
  Bottom Layer w78.74: v2(814.25,1044.25) 993.5,865 v2(1780,865) 3610,865 v2(3670.75,925.75)
GND: C1.2 C2.2 C6.2 C7.2 C8.2 C9.1 C10.1 C11.2 C12.1 C13.1 C14.1 C15.1 C16.1 C17.1 C18.1 C19.1 C20.1 C21.1 C22.1 C23.1 C24.1 C25.1 C26.1 C27.1 C28.1 D1.2 J1.1 J2.1 J3.2 J4.2 J5.1 J6.2 J7.2 P1.3 R3.1 R4.1 R10.1 R11.1 SW1.1 SW1.2 U1.3 U2.3 U3.6 U4.1 U4.2 U6.6 U6.16 U6.29 U6.39 U7.9 U7.12 U7.28 U7.29 | length 355.9
  Top Layer w19.68: v1(2253.03,2973.03) U7.12 ; v1(2848.94,2451.06) U7.28 ; U7.9 v1(3091.73,3133.27)
  other v1: 97.13,37.99 215.24,37.99 333.35,37.99 451.46,37.99 569.57,37.99 687.68,37.99 805.79,37.99 923.9,37.99 1042.01,37.99 1160.12,37.99 1278.23,37.99 1396.34,37.99 1514.45,37.99 1632.56,37.99 1750.67,37.99 1868.78,37.99 1986.89,37.99 2105,37.99 2223.11,37.99 2341.22,37.99 2459.33,37.99 2577.44,37.99 2695.55,37.99 2813.66,37.99 2931.77,37.99 3049.88,37.99 3167.99,37.99 3286.1,37.99 3404.21,37.99 3522.32,37.99 3640.43,37.99 3758.54,37.99 3876.65,37.99 3994.76,37.99 4112.87,37.99 4230.98,37.99 156.18,156.1 274.29,156.1 392.4,156.1 510.51,156.1 628.62,156.1 746.73,156.1 864.84,156.1 1101.06,156.1 1219.17,156.1 1337.28,156.1 1455.39,156.1 1573.5,156.1 1691.61,156.1 1809.72,156.1 1927.83,156.1 2045.94,156.1 2164.06,156.1 2282.17,156.1 2400.28,156.1 2518.39,156.1 2636.5,156.1 2872.72,156.1 2990.83,156.1 3108.94,156.1 3227.05,156.1 3345.16,156.1 3463.27,156.1 3581.38,156.1 3699.49,156.1 3817.6,156.1 3935.71,156.1 4053.82,156.1 4171.93,156.1 215.24,274.21 451.46,274.21 569.57,274.21 687.68,274.21 805.79,274.21 1160.12,274.21 1278.23,274.21 1396.34,274.21 1514.45,274.21 1632.56,274.21 1750.67,274.21 1868.78,274.21 1986.89,274.21 2105,274.21 2223.11,274.21 2341.22,274.21 2459.33,274.21 2577.44,274.21 2931.77,274.21 3049.88,274.21 3167.99,274.21 3286.1,274.21 3522.32,274.21 3640.43,274.21 3758.54,274.21 4112.87,274.21 4230.98,274.21 156.18,392.32 510.51,392.32 628.62,392.32 746.73,392.32 864.84,392.32 1101.06,392.32 1219.17,392.32 1337.28,392.32 1455.39,392.32 1573.5,392.32 1691.61,392.32 1927.83,392.32 2045.94,392.32 2282.17,392.32 2400.28,392.32 2518.39,392.32 2636.5,392.32 2872.72,392.32 2990.83,392.32 3108.94,392.32 3227.05,392.32 3345.16,392.32 3699.49,392.32 3817.6,392.32 4171.93,392.32 97.13,510.43 215.24,510.43 569.57,510.43 687.68,510.43 805.79,510.43 923.9,510.43 1042.01,510.43 1160.12,510.43 1278.23,510.43 1396.34,510.43 1514.45,510.43 1632.56,510.43 1868.78,510.43 1986.89,510.43 2105,510.43 2223.11,510.43 2341.22,510.43 2459.33,510.43 2577.44,510.43 2695.55,510.43 2813.66,510.43 2931.77,510.43 3049.88,510.43 3167.99,510.43 3286.1,510.43 3522.32,510.43 3640.43,510.43 3758.54,510.43 4112.87,510.43 4230.98,510.43 156.18,628.54 510.51,628.54 628.62,628.54 746.73,628.54 864.84,628.54 982.95,628.54 1101.06,628.54 1219.17,628.54 1337.28,628.54 1455.39,628.54 1573.5,628.54 2164.06,628.54 2282.17,628.54 2400.28,628.54 2636.5,628.54 3227.05,628.54 3345.16,628.54 3581.38,628.54 3699.49,628.54 3817.6,628.54 4171.93,628.54 97.13,746.65 805.79,746.65 923.9,746.65 1042.01,746.65 3758.54,746.65 4112.87,746.65 4230.98,746.65 746.73,864.76 864.84,864.76 3699.49,864.76 4171.93,864.76 97.13,982.87 215.24,982.87 569.57,982.87 687.68,982.87 1042.01,982.87 1160.12,982.87 1278.23,982.87 1396.34,982.87 1514.45,982.87 1750.67,982.87 2105,982.87 2223.11,982.87 2341.22,982.87 2459.33,982.87 3167.99,982.87 3286.1,982.87 3404.21,982.87 3522.32,982.87 3640.43,982.87 3758.54,982.87 4230.98,982.87 1101.06,1100.98 1219.17,1100.98 1337.28,1100.98 1455.39,1100.98 1809.72,1100.98 1927.83,1100.98 2045.94,1100.98 2164.06,1100.98 2282.17,1100.98 2400.28,1100.98 2518.39,1100.98 2872.72,1100.98 2990.83,1100.98 3227.05,1100.98 3345.16,1100.98 3581.38,1100.98 4171.93,1100.98 97.13,1219.09 569.57,1219.09 805.79,1219.09 923.9,1219.09 1042.01,1219.09 1160.12,1219.09 1278.23,1219.09 1396.34,1219.09 1750.67,1219.09 1868.78,1219.09 1986.89,1219.09 2105,1219.09 2223.11,1219.09 2341.22,1219.09 2813.66,1219.09 2931.77,1219.09 3049.88,1219.09 3167.99,1219.09 3286.1,1219.09 3404.21,1219.09 3522.32,1219.09 3758.54,1219.09 4230.98,1219.09 156.18,1337.2 510.51,1337.2 628.62,1337.2 864.84,1337.2 982.95,1337.2 1101.06,1337.2 1219.17,1337.2 1337.28,1337.2 2636.5,1337.2 2754.61,1337.2 2990.83,1337.2 3108.94,1337.2 3227.05,1337.2 3345.16,1337.2 3463.27,1337.2 3581.38,1337.2 3699.49,1337.2 3817.6,1337.2 4171.93,1337.2 97.13,1455.31 215.24,1455.31 569.57,1455.31 687.68,1455.31 805.79,1455.31 923.9,1455.31 1042.01,1455.31 1160.12,1455.31 1278.23,1455.31 1396.34,1455.31 1514.45,1455.31 2459.33,1455.31 2577.44,1455.31 2695.55,1455.31 2813.66,1455.31 2931.77,1455.31 3049.88,1455.31 3167.99,1455.31 3286.1,1455.31 3404.21,1455.31 3522.32,1455.31 3640.43,1455.31 3758.54,1455.31 4112.87,1455.31 4230.98,1455.31 156.18,1573.42 510.51,1573.42 628.62,1573.42 746.73,1573.42 864.84,1573.42 982.95,1573.42 1101.06,1573.42 1219.17,1573.42 1337.28,1573.42 1573.5,1573.42 2400.28,1573.42 2754.61,1573.42 2872.72,1573.42 2990.83,1573.42 3108.94,1573.42 3227.05,1573.42 3345.16,1573.42 3463.27,1573.42 3581.38,1573.42 3699.49,1573.42 3817.6,1573.42 4171.93,1573.42 97.13,1691.53 215.24,1691.53 451.46,1691.53 569.57,1691.53 687.68,1691.53 805.79,1691.53 923.9,1691.53 1042.01,1691.53 1160.12,1691.53 1278.23,1691.53 1514.45,1691.53 2459.33,1691.53 2577.44,1691.53 2695.55,1691.53 2813.66,1691.53 2931.77,1691.53 3049.88,1691.53 3167.99,1691.53 3286.1,1691.53 3522.32,1691.53 3640.43,1691.53 3758.54,1691.53 3876.65,1691.53 4112.87,1691.53 4230.98,1691.53 156.18,1809.64 274.29,1809.64 392.4,1809.64 510.51,1809.64 628.62,1809.64 746.73,1809.64 864.84,1809.64 982.95,1809.64 1101.06,1809.64 1219.17,1809.64 1337.28,1809.64 1573.5,1809.64 1691.61,1809.64 2518.39,1809.64 2636.5,1809.64 2754.61,1809.64 2872.72,1809.64 2990.83,1809.64 3108.94,1809.64 3227.05,1809.64 3345.16,1809.64 3463.27,1809.64 3581.38,1809.64 3699.49,1809.64 3817.6,1809.64 3935.71,1809.64 4053.82,1809.64 4171.93,1809.64 97.13,1927.76 215.24,1927.76 333.35,1927.76 451.46,1927.76 569.57,1927.76 687.68,1927.76 805.79,1927.76 923.9,1927.76 1042.01,1927.76 1160.12,1927.76 1986.89,1927.76 2223.11,1927.76 2695.55,1927.76 2813.66,1927.76 2931.77,1927.76 3049.88,1927.76 3286.1,1927.76 3404.21,1927.76 3522.32,1927.76 3640.43,1927.76 3758.54,1927.76 3876.65,1927.76 3994.76,1927.76 4112.87,1927.76 4230.98,1927.76 156.18,2045.87 274.29,2045.87 392.4,2045.87 510.51,2045.87 628.62,2045.87 746.73,2045.87 864.84,2045.87 982.95,2045.87 1101.06,2045.87 1219.17,2045.87 2164.06,2045.87 2754.61,2045.87 2872.72,2045.87 3108.94,2045.87 3227.05,2045.87 3345.16,2045.87 3463.27,2045.87 3581.38,2045.87 3699.49,2045.87 3817.6,2045.87 3935.71,2045.87 4053.82,2045.87 4171.93,2045.87 97.13,2163.98 215.24,2163.98 333.35,2163.98 451.46,2163.98 569.57,2163.98 687.68,2163.98 805.79,2163.98 923.9,2163.98 1042.01,2163.98 1160.12,2163.98 1278.23,2163.98 1396.34,2163.98 1750.67,2163.98 1868.78,2163.98 2577.44,2163.98 3167.99,2163.98 3286.1,2163.98 3404.21,2163.98 3522.32,2163.98 3640.43,2163.98 3758.54,2163.98 3876.65,2163.98 3994.76,2163.98 4112.87,2163.98 4230.98,2163.98 156.18,2282.09 274.29,2282.09 392.4,2282.09 510.51,2282.09 628.62,2282.09 746.73,2282.09 864.84,2282.09 982.95,2282.09 1101.06,2282.09 1219.17,2282.09 1337.28,2282.09 1691.61,2282.09 1809.72,2282.09 2282.17,2282.09 2400.28,2282.09 2636.5,2282.09 2754.61,2282.09 2872.72,2282.09 2990.83,2282.09 3108.94,2282.09 3227.05,2282.09 3345.16,2282.09 3463.27,2282.09 3581.38,2282.09 3699.49,2282.09 3817.6,2282.09 3935.71,2282.09 4053.82,2282.09 4171.93,2282.09 97.13,2400.2 215.24,2400.2 333.35,2400.2 451.46,2400.2 569.57,2400.2 687.68,2400.2 805.79,2400.2 923.9,2400.2 1160.12,2400.2 1514.45,2400.2 1632.56,2400.2 1750.67,2400.2 2223.11,2400.2 2341.22,2400.2 2577.44,2400.2 2813.66,2400.2 2931.77,2400.2 3167.99,2400.2 3286.1,2400.2 3404.21,2400.2 3522.32,2400.2 3640.43,2400.2 3758.54,2400.2 3876.65,2400.2 3994.76,2400.2 4112.87,2400.2 4230.98,2400.2 156.18,2518.31 274.29,2518.31 392.4,2518.31 510.51,2518.31 628.62,2518.31 746.73,2518.31 864.84,2518.31 982.95,2518.31 1927.83,2518.31 2164.06,2518.31 3108.94,2518.31 3227.05,2518.31 3345.16,2518.31 3463.27,2518.31 3581.38,2518.31 3699.49,2518.31 3817.6,2518.31 3935.71,2518.31 4053.82,2518.31 4171.93,2518.31 97.13,2636.42 215.24,2636.42 333.35,2636.42 451.46,2636.42 805.79,2636.42 923.9,2636.42 1160.12,2636.42 1632.56,2636.42 1750.67,2636.42 1986.89,2636.42 2223.11,2636.42 3167.99,2636.42 3286.1,2636.42 3404.21,2636.42 3522.32,2636.42 3876.65,2636.42 3994.76,2636.42 4112.87,2636.42 4230.98,2636.42 156.18,2754.53 274.29,2754.53 392.4,2754.53 864.84,2754.53 982.95,2754.53 1337.28,2754.53 1691.61,2754.53 1809.72,2754.53 1927.83,2754.53 3108.94,2754.53 3227.05,2754.53 3345.16,2754.53 3463.27,2754.53 3935.71,2754.53 4053.82,2754.53 4171.93,2754.53 97.13,2872.64 215.24,2872.64 333.35,2872.64 451.46,2872.64 805.79,2872.64 923.9,2872.64 1160.12,2872.64 2223.11,2872.64 3049.88,2872.64 3167.99,2872.64 3286.1,2872.64 3404.21,2872.64 3522.32,2872.64 3876.65,2872.64 3994.76,2872.64 4112.87,2872.64 4230.98,2872.64 156.18,2990.75 274.29,2990.75 392.4,2990.75 510.51,2990.75 628.62,2990.75 746.73,2990.75 864.84,2990.75 982.95,2990.75 1101.06,2990.75 1691.61,2990.75 1809.72,2990.75 1927.83,2990.75 2045.94,2990.75 2164.06,2990.75 3108.94,2990.75 3227.05,2990.75 3345.16,2990.75 3463.27,2990.75 3581.38,2990.75 3699.49,2990.75 3817.6,2990.75 3935.71,2990.75 4053.82,2990.75 4171.93,2990.75 97.13,3108.86 215.24,3108.86 333.35,3108.86 451.46,3108.86 569.57,3108.86 687.68,3108.86 805.79,3108.86 923.9,3108.86 1042.01,3108.86 1160.12,3108.86 1278.23,3108.86 1396.34,3108.86 1514.45,3108.86 1632.56,3108.86 1750.67,3108.86 1868.78,3108.86 1986.89,3108.86 2105,3108.86 2223.11,3108.86 3049.88,3108.86 3167.99,3108.86 3286.1,3108.86 3404.21,3108.86 3522.32,3108.86 3640.43,3108.86 3758.54,3108.86 3876.65,3108.86 3994.76,3108.86 4112.87,3108.86 4230.98,3108.86
  other v3: 2599.13,2748.15 2688.94,2748.15 2645,2795 2599.13,2838.15 2689.13,2838.15
NetC3_1: C3.1 R3.2 U1.5 | length 187.2
  Top Layer w7.87: U1.5 491.5,835 C3.1 586.02,834.09 R3.2
NetC3_2: C3.2 R1.1 | length 75.4
  Top Layer w7.87: C3.2 650.83,835.91 R1.1
NetC4_1: C4.1 R2.1 | length 78.1
  Top Layer w7.87: C4.1@3633.5,1126.69 C4.1@3635.2,1125
  Top Layer w10: C4.1 3628.5,1061.69 R2.1
NetC4_2: C4.2 R4.2 U2.5 | length 207.2
  Top Layer w7.87: R4.2 3691.5,1209.09 C4.2 3699.57,1126.93 U2.5
NetC5_1: C5.1 U3.1 | length 90.3
  Top Layer w7.87: U3.1 2724.49,740.67 C5.1
NetC23_2: C23.2 D2.3 R6.1 R8.2 R9.2 | length 354.5
  Top Layer w7.87: D2.3 1357.76,2808.39 1483.98,2808.39 R6.1 ; R9.2 R6.1 ; C23.2 1557.95,2812.17 R8.2 1488.35,2812.76 R6.1
NetC24_2: C24.2 R7.1 R10.2 U6.25 | length 442.8
  Top Layer w7.87: C24.2 R10.2@1543.5,2113.5 ; R10.2 R7.1 1720,2115 1770.51,2064.49 U6.25
  Top Layer w10: R10.2@1543.5,2113.5 R10.2
NetC25_2: C25.2 R11.2 U5.2 U6.26 | length 533.5
  Top Layer w7.87: C25.2 1429.09,2036.5 R11.2 1433.46,2033.94 U5.2 1880.35,2033.94 U6.26
NetC26_2: C26.2 U6.7 | length 215.7
  Top Layer w7.87: U6.7 C26.2
NetJ5_3: J5.3 U6.1 | length 426.9
  Top Layer w7.87: J5.3@2324.6,1385.63 U6.1
NetJ5_4: J5.4 U6.12 | length 947
  Top Layer w7.87: v1(2260,1844.02) 2260,2191.22 U6.12 U6.12@2268.78,2200
  Bottom Layer w7.87: v1(2260,1844.02) 2260,1527.01 2285,1502.01 2285,1330.59 J5.4
NetJ5_5: J5.5 U6.44 | length 374.2
  Top Layer w7.87: J5.5@2230.51,1385.59 2230.51,1545 2262.01,1576.5 U6.44
NetJ5_6: J5.6 U6.35 | length 575.7
  Top Layer w7.87: U6.35 1978.54,1604.21 1997.76,1585 v1(1997.76,1590)
  Bottom Layer w7.87: v1(1997.76,1590) 2180,1407.76 2180,1335 2229.41,1285.59 J5.6
NetJ5_7: J5.7 U6.43 | length 402.6
  Top Layer w7.87: J5.7@2130.51,1385.59 2130.51,1490.51 2230.51,1590.51 U6.43
NetJ5_8: J5.8 U6.32 | length 756.9
  Top Layer w7.87: v1(1845,1695) 1805,1735 1805,1812.24 1836.77,1844.02 U6.32
  Bottom Layer w7.87: v1(1845,1695) 2080,1460 2080,1325 2119.41,1285.59 J5.8
NetJ5_9: J5.9 U6.42 | length 431.2
  Top Layer w7.87: J5.9 2030,1430 2199.02,1599.02 U6.42
NetJ5_10: J5.10 U6.13 | length 1129
  Top Layer w7.87: J5.10 1985,1330.59 1985,1425 2091.27,1531.27 v1(2091.27,1535.64) ; v1(2230,2120) U6.13@2230,2192.72
  Top Layer w10: U6.13@2230,2192.72 U6.13
  Bottom Layer w7.87: v1(2091.27,1535.64) 2040,1586.91 2040,2030 2130,2120 v1(2230,2120)
NetJ5_11: J5.11 U6.41 | length 498.7
  Top Layer w7.87: J5.11@1930.51,1385.59 1930.51,1437.76 2069.25,1576.5 2136.5,1576.5 2167.52,1607.52 U6.41
NetJ5_12: J5.12 U6.34 | length 509.4
  Top Layer w7.87: J5.12 1880.35,1335.24 1880.35,1495.35 1947.05,1562.05 U6.34
NetJ5_13: J5.13 U6.33 | length 448.2
  Top Layer w7.87: J5.13 1830,1600 1881.3,1651.3 U6.33
NetJ5_14: J5.14 U6.31 | length 683.7
  Top Layer w7.87: J5.14 1780,1335.59 1780,1827.24 1828.27,1875.51 U6.31
NetJ5_15: J5.15 U6.27 | length 1058.2
  Top Layer w7.87: v1@1617.76,1695 1507.76,1805 1507.76,1970 1525.2,1987.44 1645,1987.44 1661.26,2003.7 1881.3,2003.7 U6.27
  Bottom Layer w7.87: v1(1625,1690) 1730,1585 J5.15
NetJ5_16: J5.16 U6.30 | length 758
  Top Layer w7.87: J5.16 1680,1335.59 1680,1442.01 1756.27,1518.28 1756.27,1837.53 1825.75,1907.01 U6.30
NetJ7_1: J7.1 R12.2 | length 440
  Top Layer w7.87: J7.1@3418.15,213.42 3418.15,410.28 R12.2
NetP1_1: P1.1 R8.1 U6.18 | length 1684.7
  Top Layer w7.87: P1.1 1080,2890 1195,3005 1575,3005 1633.35,2946.65 R8.1 1699.02,2812.76 v1(1960,2551.77) ; v1(2073.03,2470) 2073.03,2210.71 2066.26,2203.94 2075,2195.2 U6.18@2073.23,2193.43
  Top Layer w10: U6.18 U6.18@2073.23,2193.43
  Bottom Layer w7.87: v1(1960,2551.77) 2041.77,2470 v1(2073.03,2470)
NetP1_4: P1.4 U6.21 | length 1136.1
  Top Layer w7.87: U6.21 1978.54,2338.54 v1(1985,2345)
  Bottom Layer w7.87: P1.4 1800,2530 v1(1985,2345)
NetP1_5: P1.5 U6.22 | length 1054
  Top Layer w7.87: U6.22 v1(1947.05,2345)
  Bottom Layer w7.87: P1.5 1862.05,2430 v1(1947.05,2345)
NetR9_1: R9.1 SW1.3 SW1.4 | length 374.5
  Top Layer w7.87: SW1.3 SW1.4 1397.2,2667.76 R9.1
NetR12_1: R12.1 U6.23 | length 2203.6
  Top Layer w7.87: U6.23 1926.85,2127.48 1940,2114.33 1940,2034.14 1969.14,2005 v1(2070,2005) ; v1(2430,1785) 2430,1780 3418.15,791.85 R12.1
  Bottom Layer w7.87: v1(2070,2005) 2205,2005 2425,1785 v1(2430,1785)
NetR13_1: R13.1 U7.10 | length 114.3
  Top Layer w7.87: R13.1 U7.10
NetU1_1: U1.1 U2.1 U6.8 | length 5903.7
  Top Layer w7.87: v1(1095,765) v1(1095,965) ; U6.8 2505.51,2032.99 2622.52,2150 v1(2930,2150) ; v1(3490,765) v1(3490,1270)
  Bottom Layer w7.87: U1.1 948.82,1111.18 v1(1095,965) ; v1(1095,765) v1(3490,765) 3726.18,765 U2.1 ; v1(2930,2150) 3490,1590 v1(3490,1270)
NetU4_6: U4.6 U6.24 | length 2269.7
  Top Layer w7.87: v1(1715,1125) 1920,920 1920,620 1913.35,613.35 U4.6 ; v1(1775,2125) 1804.02,2095.98 U6.24
  Bottom Layer w7.87: v1(1715,1125) 1525,1125 1440,1210 1440,2045 1520,2125 v1(1775,2125)
NetU6_2: U6.2 U7.4 | length 1570.6
  Top Layer w7.87: U6.2 2800,1844.02 3035,2079.02 3035,2757.56 3019.29,2773.27 U7.4
NetU6_3: U6.3 U7.11 | length 1522.3
  Top Layer w7.87: v1(2305,3010) 2371.1,3010 U7.11 ; U6.3 2544.49,1875.51 v1(2545,1875)
  Bottom Layer w7.87: v1(2305,3010) 2545,2770 v1(2545,1875)
NetU6_4: U6.4 U7.13 | length 1369.4
  Top Layer w7.87: v1(2306.97,2933.03) U7.13 ; U6.4 2329.76,1905 v1(2515,1905)
  Bottom Layer w7.87: v1(2306.97,2933.03) 2515,2725 v1(2515,1905)
NetU6_5: U6.5 U7.22 | length 892.1
  Top Layer w7.87: U6.5 2328.23,1938.98 v1(2610,1938.98) ; v1(2608.94,2478.07) U7.22
  Bottom Layer w7.87: v1(2608.94,2478.07) 2608.94,1940.04 v1(2610,1938.98)
NetU6_9: U6.9 U7.15 | length 1089.2
  Top Layer w7.87: v1(2310,2853.03) U7.15 ; U6.9@2328.27,2065 v1(2490,2065)
  Top Layer w10: U6.9 U6.9@2328.27,2065
  Bottom Layer w7.87: v1(2310,2853.03) 2490,2673.03 v1(2490,2065)
NetU6_14: U6.14 U7.18 | length 668.6
  Top Layer w7.87: U6.14 2199.02,2654.02 2278.03,2733.03 U7.18
NetU6_19: U6.19 U7.16 | length 951.9
  Top Layer w7.87: U6.19 v1(2041.54,2595) ; v1(2041.54,2812.17) 2373.27,2812.17 U7.16
  Bottom Layer w7.87: v1(2041.54,2595) v1(2041.54,2812.17)
NetU6_20: U6.20 U7.17 | length 861.6
  Top Layer w7.87: U6.20 2010.04,2326.35 2018.82,2335.13 2018.82,2354.87 2010.04,2363.65 2010.04,2620.04 2163.03,2773.03 U7.17
Vbatt: J5.18 J6.1 R5.2 U4.5 | length 1246.8
  Top Layer w7.87: v1(1550.59,1004.41) 1550.59,949.41 1685,815 1685,659.73 1727.2,617.53 1755.35,617.53 R5.2@1777.6,595.28 ; v1(1630,1004.41) J5.18 ; R5.2@1777.6,592.6 R5.2 1823.94,638.94 U4.5
  Top Layer w78.74: J6.1 1777.6,592.6 R5.2@1777.6,595.28
  Bottom Layer w7.87: v1(1550.59,1004.41) v1(1630,1004.41)
VSW: C5.2 D1.1 L1.1 U3.8 | length 667.6
  Top Layer w19.68: U3.8 D1.1 C5.2 2662.17,682.83 2712.64,632.36 L1.1
pads on no net: D2.2 U3.2 U3.3 U3.5 U6.10 U6.11 U6.15 U6.36 U6.37 U6.38 U7.1 U7.2 U7.3 U7.5 U7.6 U7.7 U7.8 U7.14 U7.19 U7.21 U7.24 U7.25 U7.26 U7.27
copper on no net:
  other v4: 984.25,275.59 2755.91,275.59 590.55,2755.91 3740.16,2755.91

## Polygon pours and split planes (outlines as drawn)
GND on Top Layer "Top Layer GND" (solid, remove dead copper, pour order 12): 0,0 0,3435 4310,3435 4310,0
GND on Bottom Layer "GND_L02_P013" (solid, remove dead copper, pour order 13): 0,0 0,3435 4310,3435 4310,0

## Keep-outs
Top Layer:
  lines w10: 726.29,2757.57 cw(c590.55,2755.91) 726.29,2757.7 ; 1120,277.26 cw(c984.25,275.59) 1119.99,277.39 ; 2891.65,277.26 cw(c2755.91,275.59) 2891.65,277.39 ; 3875.9,2757.57 cw(c3740.16,2755.91) 3875.9,2757.7
Bottom Layer:
  lines w10: 726.29,2757.57 cw(c590.55,2755.91) 726.29,2757.7 ; 1120,277.26 cw(c984.25,275.59) 1119.99,277.39 ; 2891.65,277.26 cw(c2755.91,275.59) 2891.65,277.39 ; 3875.9,2757.57 cw(c3740.16,2755.91) 3875.9,2757.7

## Other copper
Top Layer:
  pour cut-out: 2278.83,2472.48 3035,2472.48 3035,3175 4310,3175 4310,3435 0,3435 0,3175 2281.13,3175
  text "18140A Totem Lumineux" at 50,3320 h60
  text "Nicolas Furst" at 50,3220 h60
Bottom Layer:
  pour cut-out: 0,3435 4310,3435 4310,3175 0,3175
  text "18140A Totem Lumineux" at 1250,3320 h60
  text "Nicolas Furst" at 1250,3220 h60

## Silkscreen, mask and mechanical layers (free items; w line width, h text height)
Top Overlay:
  text "-" at 660,1665 h118.11
  text "-" at 3605,1635 h118.11
  text "+" at 655,1485 h118.11
  text "+" at 3600,1455 h118.11
  text "Matrice 1" at 4240,790 h66.93 r90
  text "+" at 3935,730 h118.11 r270
  text "-" at 165,705 h118.11 r180
  text "Matrice 2" at 105,700 h66.93 r90
  text "+" at 1563.53,635 h118.11 r270
  text "-" at 4130,625 h118.11
  text "+" at 370,610 h118.11 r90
  text "-" at 2245,530 h118.11
  text "LED OUT" at 3235,100 h59.06 r90
  text "12VDC" at 1540,30 h78.74 r90
Mechanical 1:
  the board outline again, w3.94

## Text inside footprints (layer, text, board x,y; h text height)
J5: Top Overlay "1" at 2425,1465 h40
P1: Top Overlay "1" at 990,2820 h40
U5: Top Overlay "C" at 1527.76,1883.94 h30 r270; Mechanical 15 "C" at 1527.76,1883.94 h30 r270